# EAGLE board VCF-LM324-Stereo-LFO-POT2x3 (EAGLE 7.2.0)
Voltage-Controlled Low-Pass Filter with LFO using LM324 Quad-Opamp (Stereo) http://electro-music.com/forum/topic-45231-0.html&postdays=0&postorder=asc&highlight=
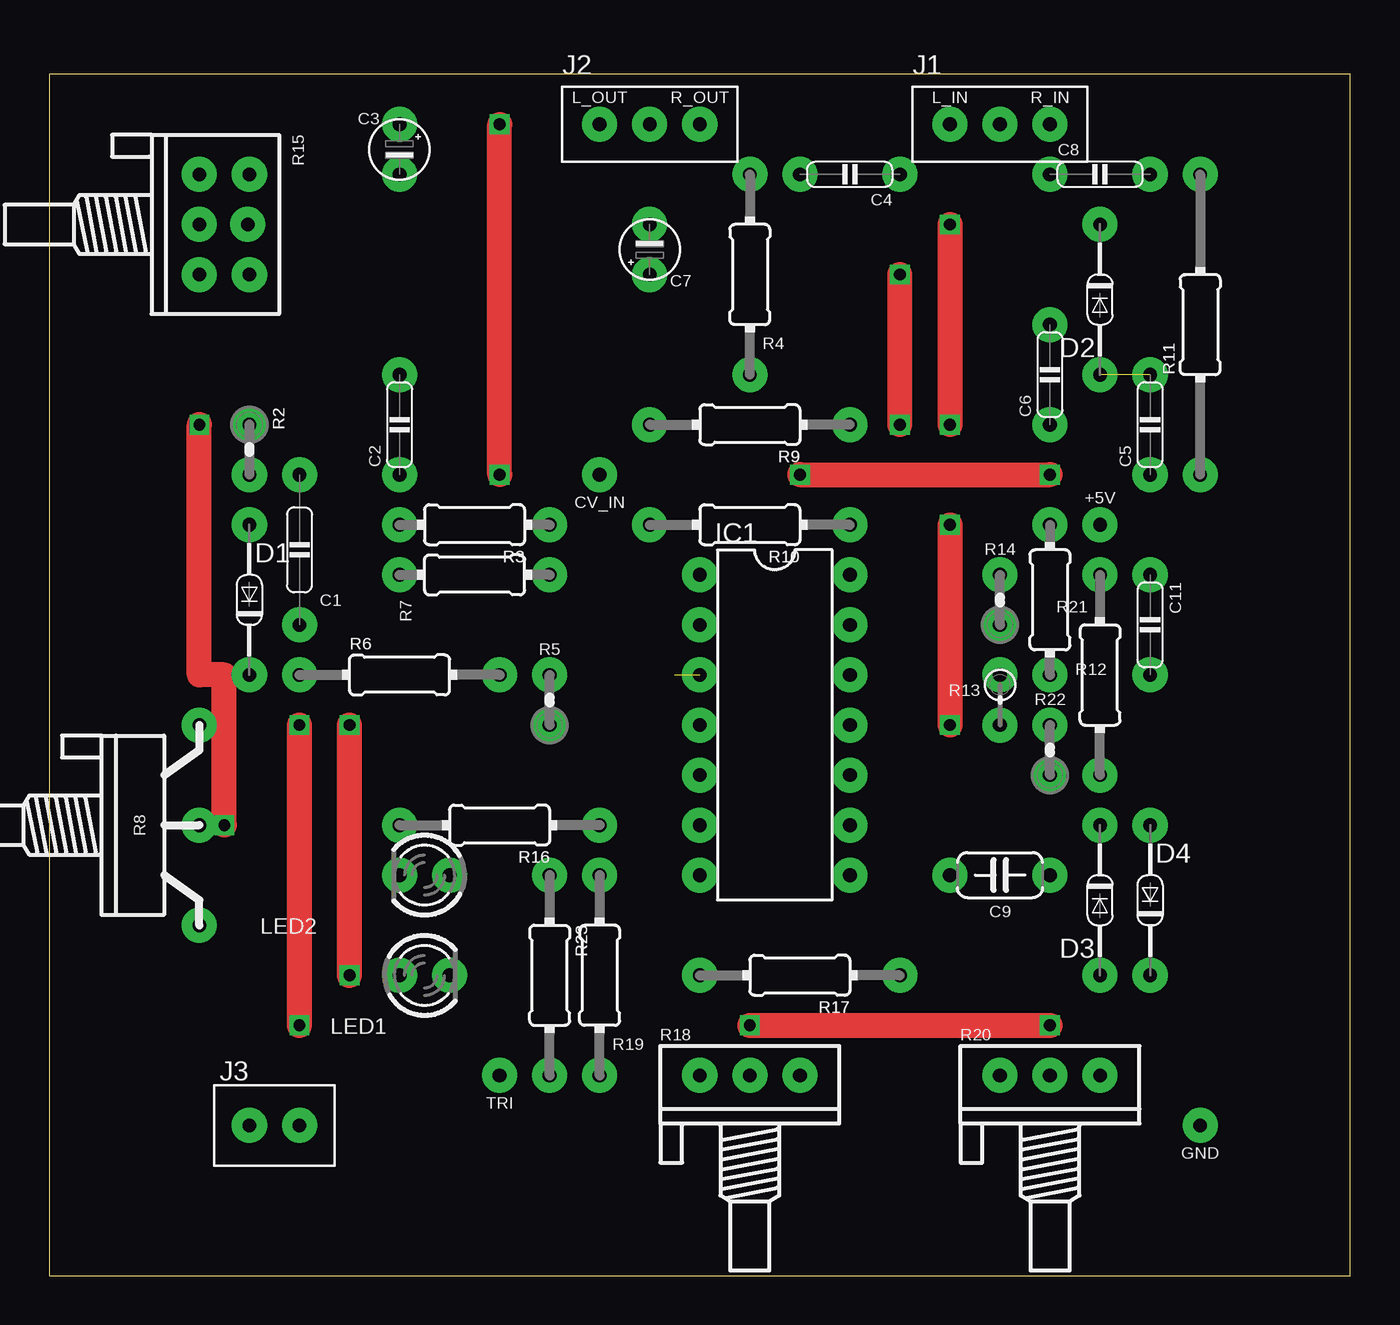
[diagram p0: board, top side]
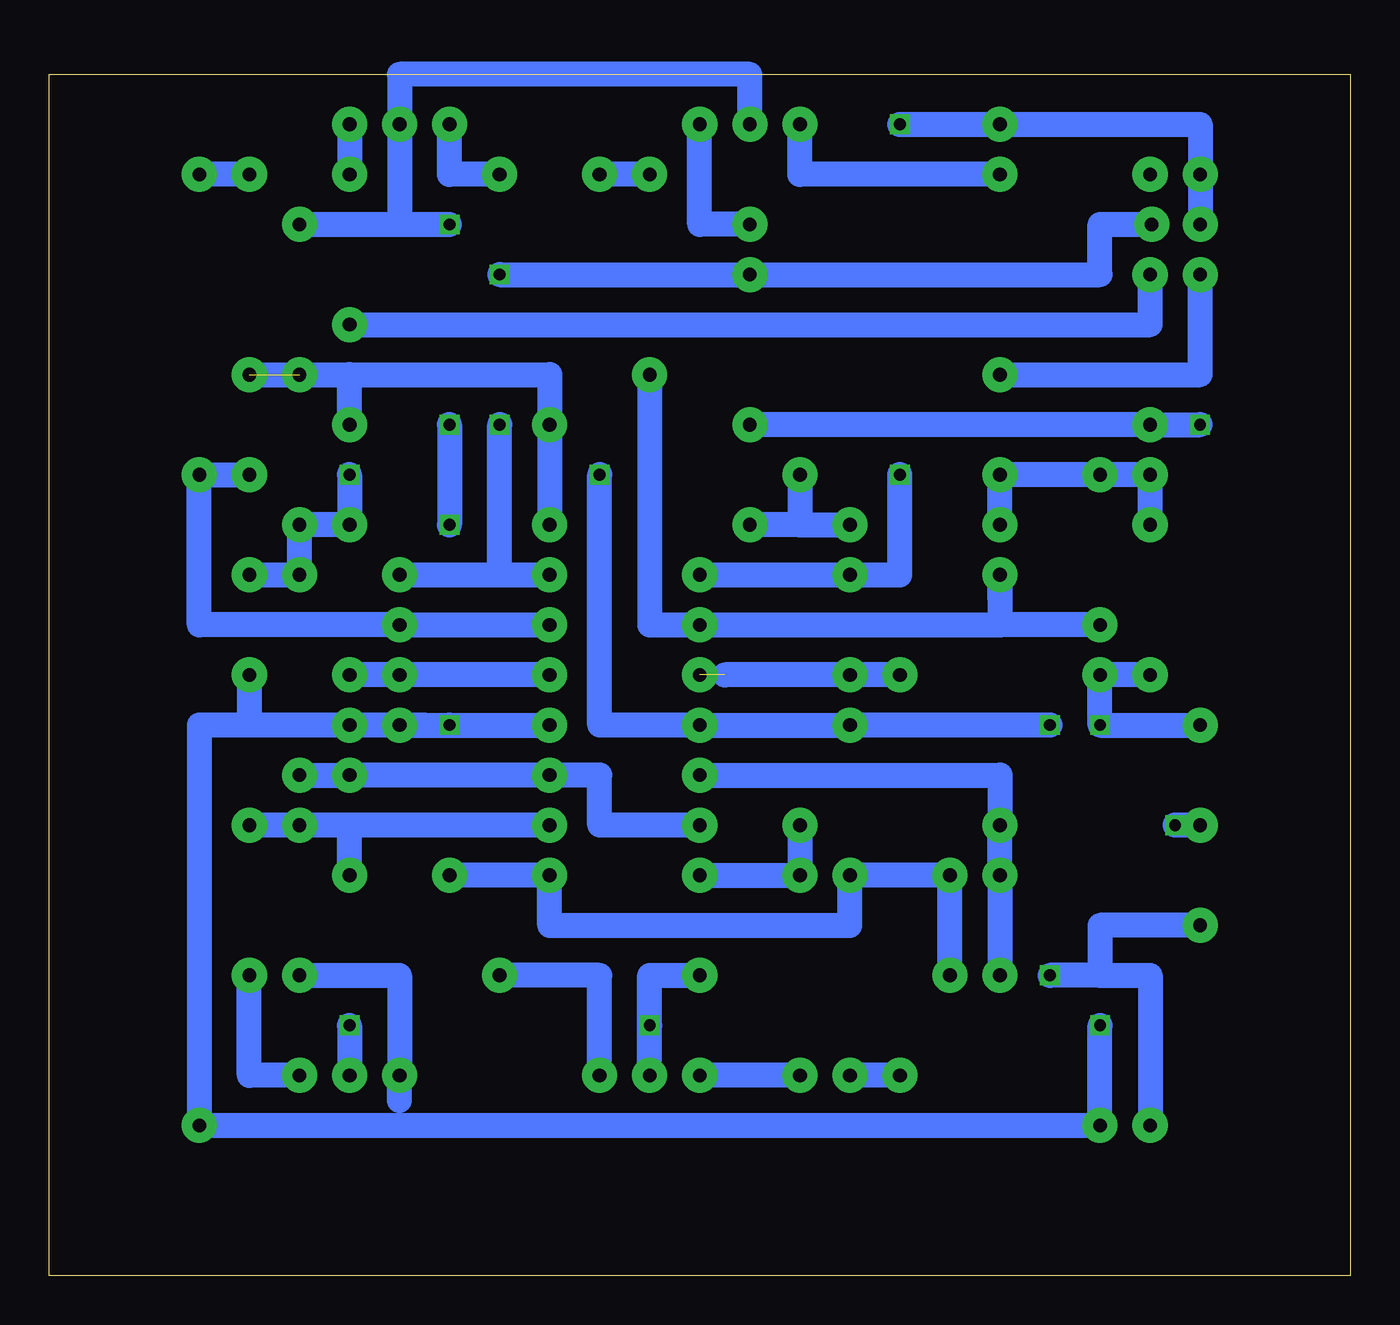
[diagram p1: board, bottom side, seen from below]

Size 66.04 x 60.96 mm. Coordinates in mm from the lower left corner, seen from the top.
Outline: 0,0 66.04,0 66.04,60.96 0,60.96 0,0
Copper layers (1*16): Top 0.035mm / dielectric 1.5mm / Bottom 0.035mm
Design rules "default *": minimum track width 10mil, minimum drill 24mil, track to track 8mil, track to pad 8mil, pad to pad 8mil, via to via 8mil, smd to smd 8mil, copper to edge 40mil, drill to drill 8mil, minimum pad ring 10mil, minimum via ring 8mil, stop-mask expansion 0mil, vias tented up to drill 0mil, thermal gap 10mil

## Footprints (pad centres in the part's own frame; a part is rotated, then mirrored left to right if it is on the bottom)
SPAD = drill 0.7 pad 1.778: 1 0,0
C075-020X044/V = drill 0.7 pad 1.778: 1 0,3.81; 2 0,-3.81
C050-020X044 = drill 0.7 pad 1.778: 1 -2.54,0; 2 2.54,0
E2,5-3/V = drill 0.7 pad 1.778: + 0,1.27; - 0,-1.27
C050-024X044 = drill 0.7 pad 1.778: 1 -2.54,0; 2 2.54,0
DO34-7V = drill 0.7 pad 1.778: A 0,3.81; C 0,-3.81
DIL14 = drill 0.7 pad 1.778: 1 -3.81,7.62; 2 -3.81,5.08; 3 -3.81,2.54; 4 -3.81,0; 5 -3.81,-2.54; 6 -3.81,-5.08; 7 -3.81,-7.62; 8 3.81,-7.62; 9 3.81,-5.08; 10 3.81,-2.54; 11 3.81,0; 12 3.81,2.54; 13 3.81,5.08; 14 3.81,7.62
CONN-3P = drill 0.7 pad 1.778: 1 0,0; 2 2.54,0; 3 5.08,0
CONN-2P = drill 0.7 pad 1.778: 1 0,0; 2 -2.54,0
LED3MM = drill 0.7 pad 1.778: A -1.27,0; K 1.27,0
0204V = drill 0.7 pad 1.778: 1 -1.27,0; 2 1.27,0
0204/7 = drill 0.7 pad 1.778: 1 -3.81,0; 2 3.81,0
0204/10-V = drill 0.7 pad 1.778: 1 0,5.08; 2 0,-5.08
0204/2V = drill 0.7 pad 1.778: 1 0,1.27; 2 0,-1.27
0204/10 = drill 0.7 pad 1.778: 1 -5.08,0; 2 5.08,0
0204/7-V = drill 0.7 pad 1.778: 1 0,3.81; 2 0,-3.81
POT-P5 = drill 0.7 pad 1.778: A -5.08,2.54; E 5.08,2.54; S 0,2.54
0204/15 = drill 0.7 pad 1.778: 1 -7.62,0; 2 7.62,0
0202V = drill 0.7 pad 1.778: 1 0,-1.27; 2 0,1.27
POT-STEREO-2X3 = drill 0.7 pad 1.778: 1-A -2.54,-2.54; 1-E 2.54,-2.54; 1-S 0,-2.54; 2-A -2.54,0; 2-E 2.54,0; 2-S 0,-0.08
POT = drill 0.7 pad 1.778: 1 -2.54,0; 2 0,0; 3 2.54,0

## Placement (x,y rotation side)
+5V  VCC  [SPAD]  53.34,38.1 270 top
C1  0.1μF  [C075-020X044/V]  12.7,36.83 180 top
C2  0.1μF  [C050-020X044]  17.78,43.18 90 top
C3  1μF  [E2,5-3/V]  17.78,57.15 0 top
C4  1μF  [C050-020X044]  40.64,55.88 180 top
C5  100nF  [C050-020X044]  55.88,43.18 90 top
C6  100nF  [C050-020X044]  50.8,45.72 90 top
C7  1μF  [E2,5-3/V]  30.48,52.07 180 top
C8  1μF  [C050-020X044]  53.34,55.88 0 top
C9  1μF  [C050-024X044]  48.26,20.32 180 top
C11  100nF  [C050-020X044]  55.88,33.02 270 top
CV_IN  CV_IN  [SPAD]  27.94,40.64 90 top
D1  1N4148  [DO34-7V]  10.16,34.29 0 top
D2  1N4148  [DO34-7V]  53.34,49.53 180 top
D3  1N4148  [DO34-7V]  53.34,19.05 180 top
D4  1N4148  [DO34-7V]  55.88,19.05 0 top
GND  GND  [SPAD]  58.42,7.62 90 top
IC1  LM324  [DIL14]  36.83,27.94 0 top
J1  A_IN  [CONN-3P]  45.72,58.42 0 top
J2  A_OUT  [CONN-3P]  27.94,58.42 0 top
J3  CONN-2P2P/H  [CONN-2P]  12.7,7.62 0 top
L_IN  AUDIO_IN  [SPAD]  45.72,58.42 270 top
L_OUT  AUDIO_OUT  [SPAD]  27.94,58.42 270 top
LED1  [LED3MM]  19.05,15.24 0 top
LED2  [LED3MM]  19.05,20.32 180 top
R2  1kΩ  [0204V]  10.16,41.91 270 top
R3  1kΩ  [0204/7]  21.59,38.1 180 top
R4  470kΩ  [0204/10-V]  35.56,50.8 180 top
R5  100kΩ  [0204/2V]  25.4,29.21 0 top
R6  100kΩ  [0204/10]  17.78,30.48 0 top
R7  100kΩ  [0204/7-V]  21.59,35.56 90 top
R8  [POT-P5]  5.08,22.86 270 top
R9  1kΩ  [0204/10]  35.56,43.18 180 top
R10  1kΩ  [0204/10]  35.56,38.1 180 top
R11  470kΩ  [0204/15]  58.42,48.26 90 top
R12  100kΩ  [0204/7-V]  50.8,34.29 180 top
R13  100kΩ  [0202V]  48.26,29.21 0 top
R14  100kΩ  [0204/2V]  48.26,34.29 0 top
R15  10kΩ  [POT-STEREO-2X3]  10.16,53.34 270 top
R16  47kΩ  [0204/10]  22.86,22.86 180 top
R17  4.7kΩ  [0204/10]  38.1,15.24 180 top
R18  10kΩ  [POT]  35.56,10.16 0 top
R19  4.7kΩ  [0204/10-V]  27.94,15.24 180 top
R20  100kΩ  [POT]  50.8,10.16 0 top
R21  100kΩ  [0204/10-V]  53.34,30.48 0 top
R22  100kΩ  [0204/2V]  50.8,26.67 0 top
R23  1kΩ  [0204/10]  25.4,15.24 270 top
R_IN  AUDIO_IN  [SPAD]  50.8,58.42 270 top
R_OUT  AUDIO_OUT  [SPAD]  33.02,58.42 270 top
TRI  TRIANGLE  [SPAD]  22.86,10.16 90 top

## Library data of the parts
+5V CV_IN GND L_IN L_OUT R_IN R_OUT TRI = pad
C1-C9 C11 = c
D1-D4 = d
IC1 = ic
J1-J3 = pinconn
LED1 LED2 = led
R2-R23 = r

## Nets
GND: C11.2 D1.C D2.C GND.1 IC1.11 J1.2 J2.2 J3.1 R6.1 R8.A R13.1 R22.1
LEFT_IN: C4.1 J1.1 L_IN.1
LEFT_OUT: C3.- J2.1 L_OUT.1
N$1: C6.2 R15.2-E
N$2: C1.1 IC1.2 R4.1 R7.1
N$3: C2.2 R15.1-E
N$4: C3.+ IC1.1 R7.2 R15.1-S
N$5: R2.1 R8.S R9.2
N$7: IC1.3 R5.1 R6.2
N$8: CV_IN.1 R3.1 R10.2
N$9: C1.2 C2.1 D1.A R2.2 R3.2
N$10: C4.2 R4.2
N$12: C7.+ IC1.14 R14.1 R15.2-S
N$13: IC1.12 R12.1 R13.2
N$14: IC1.7 R16.1 R19.2
N$15: IC1.5 LED1.A LED2.K R16.2
N$16: C5.2 C6.1 D2.A R9.1 R10.1
N$17: C5.1 IC1.13 R11.1 R14.2
N$20: C8.2 R11.2
N$26: C9.1 D3.C D4.A IC1.9
N$28: C9.2 IC1.8 LED1.K LED2.A R23.1
OA_C_IN+: IC1.6 IC1.10 R21.2 R22.2
RIGHT_IN: C8.1 J1.3 R_IN.1
RIGHT_OUT: C7.- J2.3 R_OUT.1
TRI_OUT: R23.2 TRI.1
TRIM_1_A: D3.A R20.1
TRIM_1_B: D4.C R20.3
TRIM_2_A: R17.1 R18.3
TRIM_2_B: R18.1 R19.1
TRIM_P: R17.2 R18.2 R20.2
VCC: +5V.1 C11.1 IC1.4 J3.2 R5.2 R8.E R12.2 R21.1

## Tracks (layer width: path | path; a pad name or v marks a point on that pad's centre or on a via)
GND  (via drill 0.6)
  Top 1.27: v12.7,12.7 v12.7,27.94 | v45.72,53.34 v45.72,43.18 | v45.72,38.1 v45.72,27.94
  Bottom 1.27: 46.99,27.94 R13.1 | R13.1 v45.72,27.94 IC1.11 | R13.1 R22.1 55.88,27.94 | v12.7,12.7 J3.1 GND.1 58.42,27.94 55.88,27.94 | R8.A v12.7,27.94 R6.1 D1.C | J2.2 30.48,60.96 48.26,60.96 J1.2 48.26,53.34 | 48.26,53.34 v45.72,53.34 | v45.72,43.18 v45.72,38.1 | C11.2 55.88,27.94 | D2.C 48.26,53.34
LEFT_IN
  Bottom 1.27: C4.1 45.72,55.88 J1.1
LEFT_OUT
  Bottom 1.27: C3.- 27.94,55.88 L_OUT.1
N$1
  Bottom 1.27: C6.2 10.16,48.26 R15.2-E
N$2
  Bottom 1.27: 17.78,33.02 IC1.2 35.56,33.02 R4.1 | C1.1 17.78,33.02 | 17.78,33.02 R7.1 17.78,34.29
N$3
  Bottom 1.27: C2.2 7.62,45.72 R15.1-E
N$4  (via drill 0.6)
  Top 1.27: v22.86,40.64 v22.86,58.42
  Bottom 1.27: IC1.1 R7.2 22.86,35.56 v22.86,40.64 | v22.86,58.42 C3.+ 7.62,58.42 R15.1-S
N$5  (via drill 0.6)
  Top 1.27: v8.89,22.86 8.89,30.48 7.62,30.48 v7.62,43.18
  Bottom 1.27: R8.S v8.89,22.86 | R9.2 R2.1 v7.62,43.18
N$7  (1 unrouted)
  Bottom 1.27: R6.2 R5.1 31.75,30.48
N$8
  Bottom 1.27: 27.94,38.1 R10.2 | CV_IN.1 27.94,38.1 | 27.94,38.1 R3.1
N$9
  Bottom 1.27: D1.A R2.2 C1.2 C2.1 R3.2
N$10
  Bottom 1.27: R4.2 C4.2
N$12  (via drill 0.6)
  Top 1.27: v43.18,43.18 v43.18,50.8
  Bottom 1.27: IC1.14 R14.1 43.18,35.56 v43.18,43.18 | C7.+ v43.18,50.8 12.7,50.8 12.7,53.34 10.16,53.34
N$13
  Bottom 1.27: IC1.12 R13.2 R12.1
N$14
  Bottom 1.27: R16.1 R19.2 IC1.7
N$15
  Bottom 1.27: IC1.5 17.78,25.4 R16.2 LED2.K LED1.A
N$16  (1 unrouted)
  Bottom 1.27: R10.1 R9.1 40.64,45.72 50.8,45.72 | C5.2 50.8,45.72 | C6.1 50.8,45.72
N$17
  Bottom 1.27: IC1.13 R14.2 58.42,33.02 R11.1 C5.1
N$20
  Bottom 1.27: C8.2 R11.2
N$26
  Bottom 1.27: IC1.9 50.8,22.86 | C9.1 50.8,22.86 | 50.8,22.86 D3.C D4.A
N$28
  Bottom 1.27: LED1.K LED2.A R23.1 25.4,17.78 40.64,17.78 IC1.8 C9.2
OA_C_IN+
  Bottom 1.27: IC1.6 38.1,22.86 38.1,25.4 IC1.10 R22.2 R21.2
RIGHT_IN
  Bottom 1.27: J1.3 C8.1
RIGHT_OUT
  Bottom 1.27: C7.- 33.02,53.34 R_OUT.1
TRI_OUT
  Bottom 1.27: TRI.1 R23.2
TRIM_1_A
  Bottom 1.27: D3.A 48.26,15.24 R20.1 48.26,8.89
TRIM_1_B
  Bottom 1.27: R20.3 55.88,10.16 D4.C
TRIM_2_A
  Bottom 1.27: R18.3 38.1,15.24 R17.1
TRIM_2_B
  Bottom 1.27: R19.1 R18.1
TRIM_P  (via drill 0.6)
  Top 1.27: v35.56,12.7 v50.8,12.7
  Bottom 1.27: R17.2 35.56,15.24 v35.56,12.7 R18.2 | v50.8,12.7 R20.2
VCC  (via drill 0.6)
  Top 1.27: v15.24,15.24 v15.24,27.94 | v38.1,40.64 v50.8,40.64
  Bottom 1.27: C11.1 R21.1 +5V.1 R12.2 v50.8,40.64 | 12.7,15.24 12.7,17.78 R8.E | J3.2 10.16,15.24 12.7,15.24 | 12.7,15.24 v15.24,15.24 | v15.24,27.94 R5.2 IC1.4 38.1,27.94 v38.1,40.64

## Text on the board
tDocu: LFO freq | LFO duty
Contour: 23 | 22 | 21 | 20 | 19 | 18 | 17 | 16 | 15 | 14 | 13 | 12 | 11 | 10 | 9 | 8 | 7 | 6 | 5 | 4 | 3 | 2 | 1 | 1 | 2 | 3 | 4 | 5 | 6 | 7 | 8 | 9 | 10 | 11 | 12 | 13 | 14 | 15 | 16 | 17 | 18 | 19 | 20 | 21